# Altium PCB CR-10 Motherboard.PcbDoc (part 8 of 14)
Units mil, origin at the board's own origin, x right, y up, seen from the top; angles counter-clockwise.
Board outline 3970.48 x 2769.68 mil, 2 copper layers (TopLayer, BottomLayer); 147 components, 128 nets, 667 pads, 614 vias.
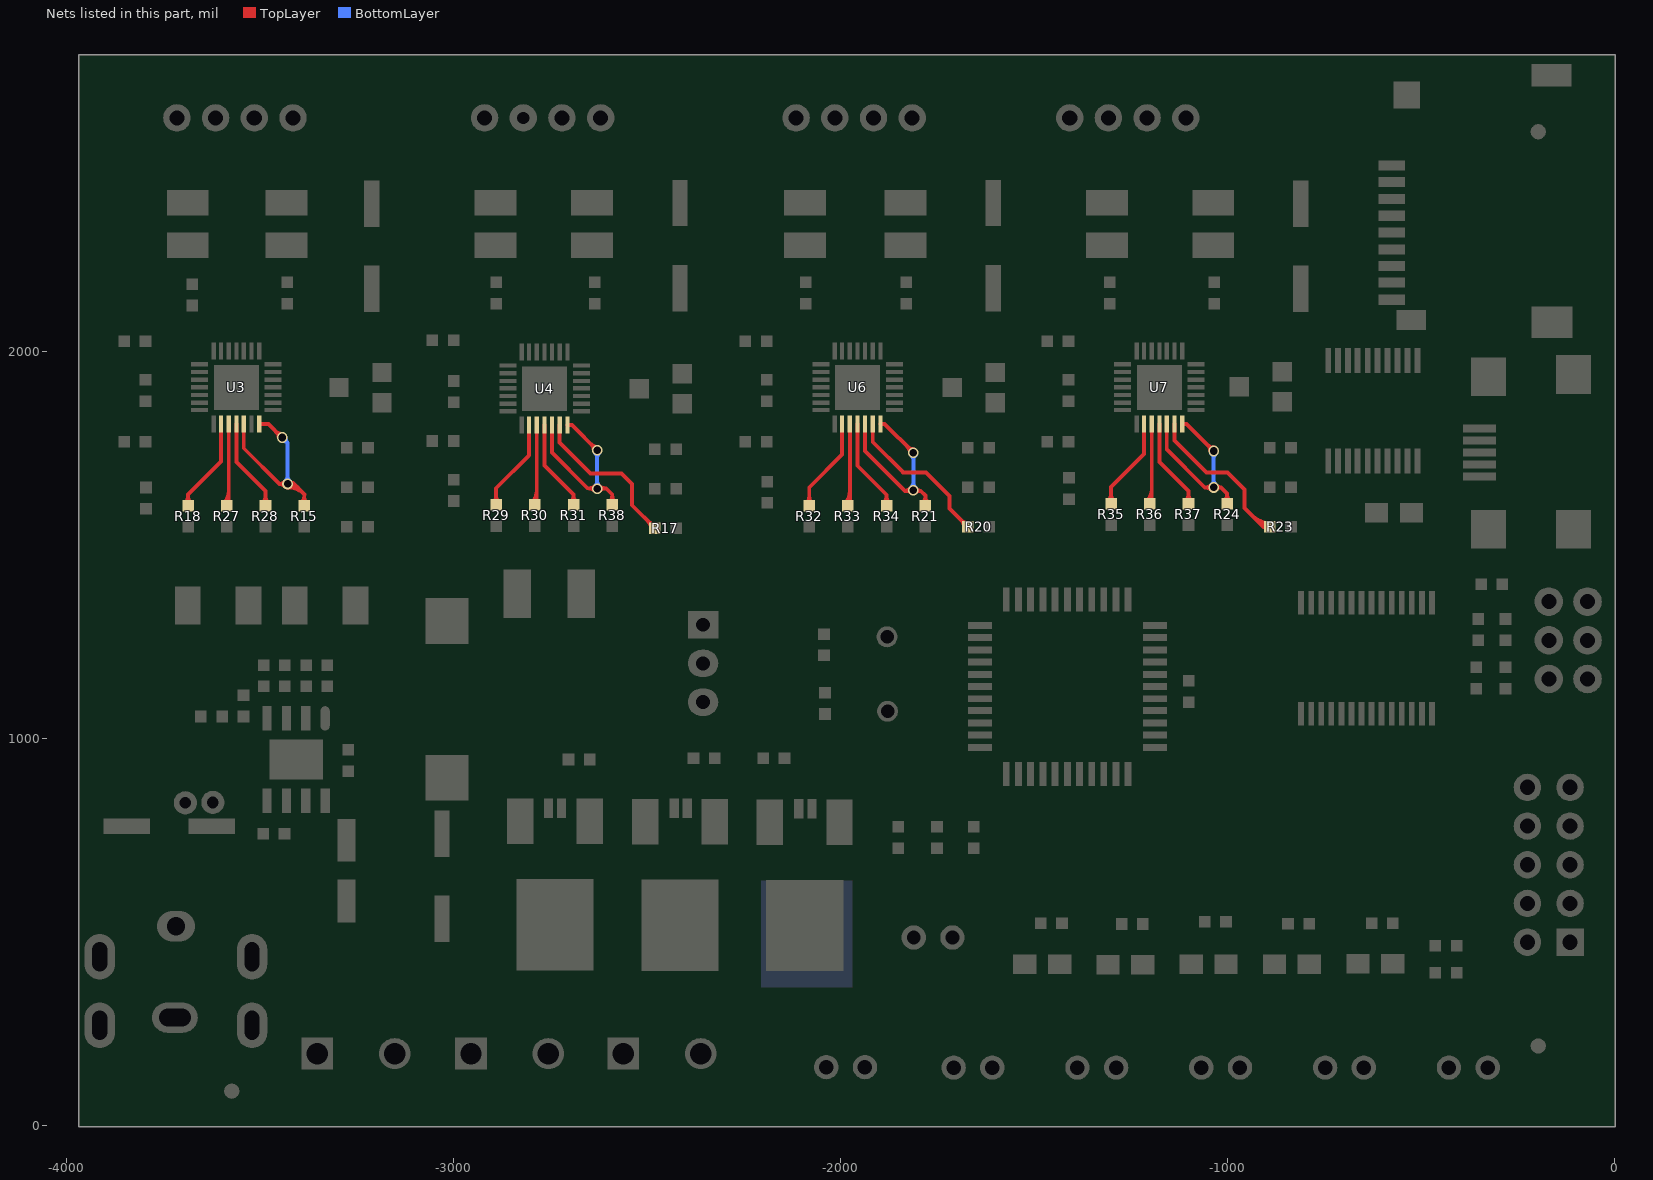
[diagram p8: the nets of this part, all layers, seen from the top]

## Via types
v1: diameter 28, hole 18, TopLayer to BottomLayer, tented both sides, 246 vias
v2: diameter 27.56, hole 19.68, TopLayer to BottomLayer, tented both sides, 196 vias
v3: diameter 20, hole 12, TopLayer to BottomLayer, tented both sides, 124 vias
v4: diameter 27.56, hole 11.81, TopLayer to BottomLayer, tented bottom, 16 vias
v5: diameter 27.56, hole 19.68, TopLayer to BottomLayer, 16 vias
v6: diameter 20, hole 12, TopLayer to BottomLayer, 12 vias
v7: diameter 28, hole 11.81, TopLayer to BottomLayer, tented both sides, 4 vias

## Nets (pads, with @x,y where several pads share a name; then routed paths per layer and width w, separated by ;. In a path a pad name is that pad's centre, name@x,y a point inside that pad or via, vN(x,y) a via of type N, cw(c..) or ccw(c..) an arc to the next point about the centre after c; other vN are vias at no path point) (continued)
NetR15_1: R15.1 U3.12 U3.14 | length 2802.5
  TopLayer w10: -3541.62,1750.93 U3.12@-3541.62,1813.88 ; -3540.62,1749.93 -3449.59,1658.9 ; U3.14@-3501.62,1813.88 -3501.12,1813.38 -3478.07,1813.38 v2@-3442.54,1777.84 ; v2@-3429.27,1659.87 cw(c-3421.02,1648.85) -3411.28,1658.59 ; v2@-3428.54,1650.12 cw(c-3428.54,1588.01) -3384.62,1631.93 ; v2@-3428.54,1660.12 cw(c-3428.54,1622.15) -3401.69,1649 ; v2@-3423.28,1651.87 cw(c-3414.03,1639.51) -3403.12,1650.42 ; R15.1@-3385.62,1602.88 -3385.62,1632.93 -3411.59,1658.9 ; -3459.23,1794.54 ccw(c-3442.54,1811.23) v2@-3442.54,1787.62 ; -3459.23,1794.54 ccw(c-3442.54,1811.23) v2@-3442.54,1787.62 ; -3459.23,1794.54 ccw(c-3442.54,1811.23) v2@-3442.54,1787.62 ; -3459.23,1794.54 ccw(c-3442.54,1811.23) v2@-3442.54,1787.62 ; -3459.23,1794.54 ccw(c-3442.54,1811.23) v2@-3442.54,1787.62 ; -3459.23,1794.54 ccw(c-3442.54,1811.23) v2@-3442.54,1787.62 ; -3459.23,1794.54 ccw(c-3442.54,1811.23) v2@-3442.54,1787.62 ; -3459.23,1794.54 ccw(c-3442.54,1811.23) v2@-3442.54,1787.62 ; -3459.23,1794.54 ccw(c-3442.54,1811.23) v2@-3442.54,1787.62 ; -3456.82,1792.12 cw(c-3470.1,1778.84) v2@-3451.31,1778.84 ; -3456.82,1792.12 cw(c-3470.1,1778.84) v2@-3451.31,1778.84 ; -3456.82,1792.12 cw(c-3470.1,1778.84) v2@-3451.31,1778.84 ; -3456.82,1792.12 cw(c-3470.1,1778.84) v2@-3451.31,1778.84 ; -3456.82,1792.12 cw(c-3470.1,1778.84) v2@-3451.31,1778.84 ; -3456.82,1792.12 cw(c-3470.1,1778.84) v2@-3451.31,1778.84 ; -3456.82,1792.12 cw(c-3470.1,1778.84) v2@-3451.31,1778.84 ; -3456.82,1792.12 cw(c-3470.1,1778.84) v2@-3451.31,1778.84 ; -3456.82,1792.12 cw(c-3470.1,1778.84) v2@-3451.31,1778.84 ; -3449.59,1658.9 cw(c-3449.59,1638.04) v2@-3434.77,1652.72 ; -3449.59,1658.9 ccw(c-3449.59,1679.75) v2@-3434.77,1665.07 ; -3449.59,1658.9 cw(c-3449.59,1638.04) v2@-3434.77,1652.72 ; -3449.59,1658.9 ccw(c-3449.59,1679.75) v2@-3434.77,1665.07 ; -3449.59,1658.9 cw(c-3449.59,1638.04) v2@-3434.77,1652.72 ; -3449.59,1658.9 ccw(c-3449.59,1679.75) v2@-3434.77,1665.07 ; -3449.59,1658.9 cw(c-3449.59,1638.04) v2@-3434.77,1652.72 ; -3449.59,1658.9 ccw(c-3449.59,1679.75) v2@-3434.77,1665.07 ; -3449.59,1658.9 cw(c-3449.59,1638.04) v2@-3434.77,1652.72 ; -3449.59,1658.9 ccw(c-3449.59,1679.75) v2@-3434.77,1665.07 ; -3449.59,1658.9 ccw(c-3449.59,1679.75) v2@-3434.77,1665.07 ; -3449.59,1658.9 cw(c-3449.59,1638.04) v2@-3434.77,1652.72 ; -3449.59,1658.9 ccw(c-3449.59,1679.75) v2@-3434.77,1665.07 ; -3449.59,1658.9 cw(c-3449.59,1638.04) v2@-3434.77,1652.72 ; -3449.59,1658.9 ccw(c-3449.59,1679.75) v2@-3434.77,1665.07 ; -3449.59,1658.9 cw(c-3449.59,1638.04) v2@-3434.77,1652.72 ; -3449.59,1658.9 ccw(c-3449.59,1679.75) v2@-3434.77,1665.07 ; -3449.59,1658.9 cw(c-3449.59,1638.04) v2@-3434.77,1652.72 ; -3449.59,1658.9 -3411.59,1658.9 ; v2@-3428.83,1660.08 cw(c-3423.17,1637.34) -3406.6,1653.91 ; v2@-3428.83,1660.08 cw(c-3423.17,1637.34) -3406.6,1653.91 ; v2@-3428.83,1660.08 cw(c-3423.17,1637.34) -3406.6,1653.91 ; v2@-3428.83,1660.08 cw(c-3423.17,1637.34) -3406.6,1653.91 ; v2@-3428.83,1660.08 cw(c-3423.17,1637.34) -3406.6,1653.91 ; v2@-3428.83,1660.08 cw(c-3423.17,1637.34) -3406.6,1653.91 ; v2@-3428.83,1660.08 cw(c-3423.17,1637.34) -3406.6,1653.91 ; v2@-3428.83,1660.08 cw(c-3423.17,1637.34) -3406.6,1653.91 ; v2@-3426.42,1650.38 cw(c-3418.19,1617.31) -3394.1,1641.4 ; v2@-3426.42,1650.38 cw(c-3418.19,1617.31) -3394.1,1641.4 ; v2@-3426.42,1650.38 cw(c-3418.19,1617.31) -3394.1,1641.4 ; v2@-3426.42,1650.38 cw(c-3418.19,1617.31) -3394.1,1641.4 ; v2@-3426.42,1650.38 cw(c-3418.19,1617.31) -3394.1,1641.4 ; v2@-3426.42,1650.38 cw(c-3418.19,1617.31) -3394.1,1641.4 ; v2@-3426.42,1650.38 cw(c-3418.19,1617.31) -3394.1,1641.4 ; v2@-3426.42,1650.38 cw(c-3418.19,1617.31) -3394.1,1641.4 ; v2@-3421.36,1653.83 cw(c-3411.59,1646.93) -3411.59,1658.9 ; v2@-3421.36,1653.83 cw(c-3411.59,1646.93) -3411.59,1658.9 ; v2@-3421.36,1653.83 cw(c-3411.59,1646.93) -3411.59,1658.9 ; v2@-3421.36,1653.83 cw(c-3411.59,1646.93) -3411.59,1658.9 ; v2@-3421.36,1653.83 cw(c-3411.59,1646.93) -3411.59,1658.9 ; v2@-3421.36,1653.83 cw(c-3411.59,1646.93) -3411.59,1658.9 ; v2@-3421.36,1653.83 cw(c-3411.59,1646.93) -3411.59,1658.9 ; v2@-3421.36,1653.83 cw(c-3411.59,1646.93) -3411.59,1658.9 ; v2@-3421.36,1653.83 cw(c-3411.59,1646.93) -3411.59,1658.9 ; v2@-3421.36,1663.96 ccw(c-3411.59,1670.86) -3411.59,1658.9 ; v2@-3421.36,1663.96 ccw(c-3411.59,1670.86) -3411.59,1658.9 ; v2@-3421.36,1663.96 ccw(c-3411.59,1670.86) -3411.59,1658.9 ; v2@-3421.36,1663.96 ccw(c-3411.59,1670.86) -3411.59,1658.9 ; v2@-3421.36,1663.96 ccw(c-3411.59,1670.86) -3411.59,1658.9 ; v2@-3421.36,1663.96 ccw(c-3411.59,1670.86) -3411.59,1658.9 ; v2@-3421.36,1663.96 ccw(c-3411.59,1670.86) -3411.59,1658.9 ; v2@-3421.36,1663.96 ccw(c-3411.59,1670.86) -3411.59,1658.9 ; v2@-3421.36,1663.96 ccw(c-3411.59,1670.86) -3411.59,1658.9 ; R15.1@-3392.69,1609.95 ccw(c-3409.76,1627.02) -3385.62,1627.02 ; R15.1@-3392.69,1609.95 ccw(c-3409.76,1627.02) -3385.62,1627.02 ; R15.1@-3392.69,1609.95 ccw(c-3409.76,1627.02) -3385.62,1627.02 ; R15.1@-3392.69,1609.95 ccw(c-3409.76,1627.02) -3385.62,1627.02 ; R15.1@-3392.69,1609.95 ccw(c-3409.76,1627.02) -3385.62,1627.02 ; R15.1@-3392.69,1609.95 ccw(c-3409.76,1627.02) -3385.62,1627.02 ; R15.1@-3392.69,1609.95 ccw(c-3409.76,1627.02) -3385.62,1627.02 ; R15.1@-3392.69,1609.95 ccw(c-3409.76,1627.02) -3385.62,1627.02 ; R15.1@-3392.69,1609.95 ccw(c-3409.76,1627.02) -3385.62,1627.02 ; -3385.62,1627.02 ccw(c-3361.48,1627.02) R15.1@-3378.55,1609.95 ; -3385.62,1627.02 ccw(c-3361.48,1627.02) R15.1@-3378.55,1609.95 ; -3385.62,1627.02 ccw(c-3361.48,1627.02) R15.1@-3378.55,1609.95 ; -3385.62,1627.02 ccw(c-3361.48,1627.02) R15.1@-3378.55,1609.95 ; -3385.62,1627.02 ccw(c-3361.48,1627.02) R15.1@-3378.55,1609.95 ; -3385.62,1627.02 ccw(c-3361.48,1627.02) R15.1@-3378.55,1609.95 ; -3385.62,1627.02 ccw(c-3361.48,1627.02) R15.1@-3378.55,1609.95 ; -3385.62,1627.02 ccw(c-3361.48,1627.02) R15.1@-3378.55,1609.95 ; -3385.62,1627.02 ccw(c-3361.48,1627.02) R15.1@-3378.55,1609.95
  BottomLayer w10: v2(-3442.54,1778.84) -3428.54,1764.84 ; v2(-3428.54,1658.9) -3428.54,1764.84 ; v2@-3442.1,1770.07 cw(c-3441.22,1752.16) -3428.54,1764.84 ; v2@-3442.1,1770.07 cw(c-3441.22,1752.16) -3428.54,1764.84 ; v2@-3442.1,1770.07 cw(c-3441.22,1752.16) -3428.54,1764.84 ; v2@-3442.1,1770.07 cw(c-3441.22,1752.16) -3428.54,1764.84 ; v2@-3442.1,1770.07 cw(c-3441.22,1752.16) -3428.54,1764.84 ; v2@-3442.1,1770.07 cw(c-3441.22,1752.16) -3428.54,1764.84 ; v2@-3442.1,1770.07 cw(c-3441.22,1752.16) -3428.54,1764.84 ; v2@-3442.1,1770.07 cw(c-3441.22,1752.16) -3428.54,1764.84 ; v2@-3442.1,1770.07 cw(c-3441.22,1752.16) -3428.54,1764.84 ; v2@-3434.74,1665.1 ccw(c-3449.73,1680.09) -3428.54,1680.09 ; v2@-3434.74,1665.1 ccw(c-3449.73,1680.09) -3428.54,1680.09 ; v2@-3434.74,1665.1 ccw(c-3449.73,1680.09) -3428.54,1680.09 ; v2@-3434.74,1665.1 ccw(c-3449.73,1680.09) -3428.54,1680.09 ; v2@-3434.74,1665.1 ccw(c-3449.73,1680.09) -3428.54,1680.09 ; v2@-3434.74,1665.1 ccw(c-3449.73,1680.09) -3428.54,1680.09 ; v2@-3434.74,1665.1 ccw(c-3449.73,1680.09) -3428.54,1680.09 ; v2@-3434.74,1665.1 ccw(c-3449.73,1680.09) -3428.54,1680.09 ; v2@-3434.74,1665.1 ccw(c-3449.73,1680.09) -3428.54,1680.09 ; v2@-3433.77,1778.41 ccw(c-3415.86,1777.52) -3428.54,1764.84 ; v2@-3433.77,1778.41 ccw(c-3415.86,1777.52) -3428.54,1764.84 ; v2@-3433.77,1778.41 ccw(c-3415.86,1777.52) -3428.54,1764.84 ; v2@-3433.77,1778.41 ccw(c-3415.86,1777.52) -3428.54,1764.84 ; v2@-3433.77,1778.41 ccw(c-3415.86,1777.52) -3428.54,1764.84 ; v2@-3433.77,1778.41 ccw(c-3415.86,1777.52) -3428.54,1764.84 ; v2@-3433.77,1778.41 ccw(c-3415.86,1777.52) -3428.54,1764.84 ; v2@-3433.77,1778.41 ccw(c-3415.86,1777.52) -3428.54,1764.84 ; v2@-3433.77,1778.41 ccw(c-3415.86,1777.52) -3428.54,1764.84 ; -3428.54,1680.09 ccw(c-3407.34,1680.09) v2@-3422.33,1665.1 ; -3428.54,1680.09 ccw(c-3407.34,1680.09) v2@-3422.33,1665.1 ; -3428.54,1680.09 ccw(c-3407.34,1680.09) v2@-3422.33,1665.1 ; -3428.54,1680.09 ccw(c-3407.34,1680.09) v2@-3422.33,1665.1 ; -3428.54,1680.09 ccw(c-3407.34,1680.09) v2@-3422.33,1665.1 ; -3428.54,1680.09 ccw(c-3407.34,1680.09) v2@-3422.33,1665.1 ; -3428.54,1680.09 ccw(c-3407.34,1680.09) v2@-3422.33,1665.1 ; -3428.54,1680.09 ccw(c-3407.34,1680.09) v2@-3422.33,1665.1 ; -3428.54,1680.09 ccw(c-3407.34,1680.09) v2@-3422.33,1665.1
NetR17_1: R17.1 U4.13 | length 756.1
  TopLayer w10: U4.13@-2725.54,1810.84 -2725.54,1765.84 -2645.54,1685.84 -2565.54,1685.84 -2538.54,1658.84 -2538.54,1603.84 R17.1@-2479.54,1544.84 ; -2496.61,1561.91 cw(c-2513.68,1544.84) R17.1@-2489.54,1544.84 ; -2496.61,1561.91 ccw(c-2479.54,1578.98) R17.1@-2479.54,1554.84 ; -2496.61,1561.91 cw(c-2513.68,1544.84) R17.1@-2489.54,1544.84 ; -2496.61,1561.91 ccw(c-2479.54,1578.98) R17.1@-2479.54,1554.84 ; -2496.61,1561.91 cw(c-2513.68,1544.84) R17.1@-2489.54,1544.84 ; -2496.61,1561.91 ccw(c-2479.54,1578.98) R17.1@-2479.54,1554.84 ; -2496.61,1561.91 cw(c-2513.68,1544.84) R17.1@-2489.54,1544.84 ; -2496.61,1561.91 ccw(c-2479.54,1578.98) R17.1@-2479.54,1554.84 ; -2496.61,1561.91 cw(c-2513.68,1544.84) R17.1@-2489.54,1544.84 ; -2496.61,1561.91 ccw(c-2479.54,1578.98) R17.1@-2479.54,1554.84 ; -2496.61,1561.91 ccw(c-2479.54,1578.98) R17.1@-2479.54,1554.84 ; -2496.61,1561.91 cw(c-2513.68,1544.84) R17.1@-2489.54,1544.84 ; -2496.61,1561.91 ccw(c-2479.54,1578.98) R17.1@-2479.54,1554.84 ; -2496.61,1561.91 cw(c-2513.68,1544.84) R17.1@-2489.54,1544.84 ; -2496.61,1561.91 ccw(c-2479.54,1578.98) R17.1@-2479.54,1554.84 ; -2496.61,1561.91 cw(c-2513.68,1544.84) R17.1@-2489.54,1544.84 ; -2496.61,1561.91 ccw(c-2479.54,1578.98) R17.1@-2479.54,1554.84 ; -2496.61,1561.91 cw(c-2513.68,1544.84) R17.1@-2489.54,1544.84
NetR18_1: R18.1 U3.9 | length 576
  TopLayer w10: R18.1@-3685.62,1602.88 -3685.62,1631.76 -3600.62,1716.76 -3600.62,1776.88 ; U3.9@-3600.62,1795.97 -3600.62,1776.97 -3600.54,1776.88 ; U3.9@-3600.62,1813.88 -3600.62,1807.64 U3.9@-3600.54,1807.55 ; R18.1@-3692.69,1609.95 ccw(c-3709.76,1627.02) -3685.62,1627.02 ; R18.1@-3692.69,1609.95 ccw(c-3709.76,1627.02) -3685.62,1627.02 ; R18.1@-3692.69,1609.95 ccw(c-3709.76,1627.02) -3685.62,1627.02 ; R18.1@-3692.69,1609.95 ccw(c-3709.76,1627.02) -3685.62,1627.02 ; R18.1@-3692.69,1609.95 ccw(c-3709.76,1627.02) -3685.62,1627.02 ; R18.1@-3692.69,1609.95 ccw(c-3709.76,1627.02) -3685.62,1627.02 ; R18.1@-3692.69,1609.95 ccw(c-3709.76,1627.02) -3685.62,1627.02 ; R18.1@-3692.69,1609.95 ccw(c-3709.76,1627.02) -3685.62,1627.02 ; R18.1@-3692.69,1609.95 ccw(c-3709.76,1627.02) -3685.62,1627.02 ; -3685.62,1627.02 ccw(c-3661.48,1627.02) R18.1@-3678.55,1609.95 ; -3685.62,1627.02 ccw(c-3661.48,1627.02) R18.1@-3678.55,1609.95 ; -3685.62,1627.02 ccw(c-3661.48,1627.02) R18.1@-3678.55,1609.95 ; -3685.62,1627.02 ccw(c-3661.48,1627.02) R18.1@-3678.55,1609.95 ; -3685.62,1627.02 ccw(c-3661.48,1627.02) R18.1@-3678.55,1609.95 ; -3685.62,1627.02 ccw(c-3661.48,1627.02) R18.1@-3678.55,1609.95 ; -3685.62,1627.02 ccw(c-3661.48,1627.02) R18.1@-3678.55,1609.95 ; -3685.62,1627.02 ccw(c-3661.48,1627.02) R18.1@-3678.55,1609.95 ; -3685.62,1627.02 ccw(c-3661.48,1627.02) R18.1@-3678.55,1609.95
NetR20_1: R20.1 U6.13 | length 743.8
  TopLayer w10: U6.13@-1916.62,1813.88 -1916.62,1767.93 -1838.15,1689.45 -1838.15,1688.45 -1779.15,1688.45 -1718.54,1627.84 -1718.54,1595.79 R20.1@-1670.62,1547.88 ; -1687.69,1564.95 cw(c-1704.76,1547.88) R20.1@-1680.62,1547.88 ; -1687.69,1564.95 ccw(c-1670.62,1582.02) R20.1@-1670.62,1557.88 ; -1687.69,1564.95 cw(c-1704.76,1547.88) R20.1@-1680.62,1547.88 ; -1687.69,1564.95 ccw(c-1670.62,1582.02) R20.1@-1670.62,1557.88 ; -1687.69,1564.95 cw(c-1704.76,1547.88) R20.1@-1680.62,1547.88 ; -1687.69,1564.95 ccw(c-1670.62,1582.02) R20.1@-1670.62,1557.88 ; -1687.69,1564.95 cw(c-1704.76,1547.88) R20.1@-1680.62,1547.88 ; -1687.69,1564.95 ccw(c-1670.62,1582.02) R20.1@-1670.62,1557.88 ; -1687.69,1564.95 cw(c-1704.76,1547.88) R20.1@-1680.62,1547.88 ; -1687.69,1564.95 ccw(c-1670.62,1582.02) R20.1@-1670.62,1557.88 ; -1687.69,1564.95 ccw(c-1670.62,1582.02) R20.1@-1670.62,1557.88 ; -1687.69,1564.95 cw(c-1704.76,1547.88) R20.1@-1680.62,1547.88 ; -1687.69,1564.95 ccw(c-1670.62,1582.02) R20.1@-1670.62,1557.88 ; -1687.69,1564.95 cw(c-1704.76,1547.88) R20.1@-1680.62,1547.88 ; -1687.69,1564.95 ccw(c-1670.62,1582.02) R20.1@-1670.62,1557.88 ; -1687.69,1564.95 cw(c-1704.76,1547.88) R20.1@-1680.62,1547.88 ; -1687.69,1564.95 ccw(c-1670.62,1582.02) R20.1@-1670.62,1557.88 ; -1687.69,1564.95 cw(c-1704.76,1547.88) R20.1@-1680.62,1547.88
NetR21_1: R21.1 U6.12 U6.14 | length 2237.5
  TopLayer w10: U6.12@-1936.62,1813.88 -1936.62,1743.93 -1833.54,1640.84 ; U6.14@-1896.12,1813.88 U6.14@-1896.62,1813.88 -1885.67,1813.88 v2(-1811.54,1739.75) ; v2@-1804,1647.35 ccw(c-1792.54,1654.2) -1792.54,1640.84 ; R21.1@-1780.62,1602.88 -1780.62,1628.93 -1792.54,1640.84 ; -1833.53,1640.84 ccw(c-1833.53,1659.9) v2@-1818.47,1648.22 ; -1833.53,1640.84 ccw(c-1833.53,1659.9) v2@-1818.47,1648.22 ; -1833.53,1640.84 ccw(c-1833.53,1659.9) v2@-1818.47,1648.22 ; -1833.53,1640.84 ccw(c-1833.53,1659.9) v2@-1818.47,1648.22 ; -1833.53,1640.84 ccw(c-1833.53,1659.9) v2@-1818.47,1648.22 ; -1833.53,1640.84 ccw(c-1833.53,1659.9) v2@-1818.47,1648.22 ; -1833.53,1640.84 ccw(c-1833.53,1659.9) v2@-1818.47,1648.22 ; -1833.53,1640.84 ccw(c-1833.53,1659.9) v2@-1818.47,1648.22 ; -1833.53,1640.84 ccw(c-1833.53,1659.9) v2@-1818.47,1648.22 ; -1833.54,1640.84 -1792.54,1640.84 ; -1827.9,1640.84 cw(c-1827.9,1626.48) v2@-1817.74,1636.63 ; -1827.9,1640.84 cw(c-1827.9,1626.48) v2@-1817.74,1636.63 ; -1827.9,1640.84 cw(c-1827.9,1626.48) v2@-1817.74,1636.63 ; -1827.9,1640.84 cw(c-1827.9,1626.48) v2@-1817.74,1636.63 ; -1827.9,1640.84 cw(c-1827.9,1626.48) v2@-1817.74,1636.63 ; -1827.9,1640.84 cw(c-1827.9,1626.48) v2@-1817.74,1636.63 ; -1827.9,1640.84 cw(c-1827.9,1626.48) v2@-1817.74,1636.63 ; -1827.9,1640.84 cw(c-1827.9,1626.48) v2@-1817.74,1636.63 ; -1827.9,1640.84 cw(c-1827.9,1626.48) v2@-1817.74,1636.63 ; -1826.52,1754.73 cw(c-1841.51,1739.75) v2@-1820.31,1739.75 ; -1826.52,1754.73 ccw(c-1811.54,1769.72) v2@-1811.54,1748.52 ; -1826.52,1754.73 cw(c-1841.51,1739.75) v2@-1820.31,1739.75 ; -1826.52,1754.73 ccw(c-1811.54,1769.72) v2@-1811.54,1748.52 ; -1826.52,1754.73 cw(c-1841.51,1739.75) v2@-1820.31,1739.75 ; -1826.52,1754.73 ccw(c-1811.54,1769.72) v2@-1811.54,1748.52 ; -1826.52,1754.73 cw(c-1841.51,1739.75) v2@-1820.31,1739.75 ; -1826.52,1754.73 ccw(c-1811.54,1769.72) v2@-1811.54,1748.52 ; -1826.52,1754.73 cw(c-1841.51,1739.75) v2@-1820.31,1739.75 ; -1826.52,1754.73 ccw(c-1811.54,1769.72) v2@-1811.54,1748.52 ; -1826.52,1754.73 ccw(c-1811.54,1769.72) v2@-1811.54,1748.52 ; -1826.52,1754.73 cw(c-1841.51,1739.75) v2@-1820.31,1739.75 ; -1826.52,1754.73 ccw(c-1811.54,1769.72) v2@-1811.54,1748.52 ; -1826.52,1754.73 cw(c-1841.51,1739.75) v2@-1820.31,1739.75 ; -1826.52,1754.73 ccw(c-1811.54,1769.72) v2@-1811.54,1748.52 ; -1826.52,1754.73 cw(c-1841.51,1739.75) v2@-1820.31,1739.75 ; -1826.52,1754.73 ccw(c-1811.54,1769.72) v2@-1811.54,1748.52 ; -1826.52,1754.73 cw(c-1841.51,1739.75) v2@-1820.31,1739.75 ; v2@-1805.33,1636.63 cw(c-1795.17,1626.48) -1795.17,1640.84 ; v2@-1805.33,1636.63 cw(c-1795.17,1626.48) -1795.17,1640.84 ; v2@-1805.33,1636.63 cw(c-1795.17,1626.48) -1795.17,1640.84 ; v2@-1805.33,1636.63 cw(c-1795.17,1626.48) -1795.17,1640.84 ; v2@-1805.33,1636.63 cw(c-1795.17,1626.48) -1795.17,1640.84 ; v2@-1805.33,1636.63 cw(c-1795.17,1626.48) -1795.17,1640.84 ; v2@-1805.33,1636.63 cw(c-1795.17,1626.48) -1795.17,1640.84 ; v2@-1805.33,1636.63 cw(c-1795.17,1626.48) -1795.17,1640.84 ; v2@-1805.33,1636.63 cw(c-1795.17,1626.48) -1795.17,1640.84 ; v2@-1804.02,1647.38 ccw(c-1792.43,1654.38) -1792.43,1640.84 ; v2@-1804.02,1647.38 ccw(c-1792.43,1654.38) -1792.43,1640.84 ; v2@-1804.02,1647.38 ccw(c-1792.43,1654.38) -1792.43,1640.84 ; v2@-1804.02,1647.38 ccw(c-1792.43,1654.38) -1792.43,1640.84 ; v2@-1804.02,1647.38 ccw(c-1792.43,1654.38) -1792.43,1640.84 ; v2@-1804.02,1647.38 ccw(c-1792.43,1654.38) -1792.43,1640.84 ; v2@-1804.02,1647.38 ccw(c-1792.43,1654.38) -1792.43,1640.84 ; v2@-1804.02,1647.38 ccw(c-1792.43,1654.38) -1792.43,1640.84 ; R21.1@-1787.69,1609.95 ccw(c-1804.76,1627.02) -1780.62,1627.02 ; R21.1@-1787.69,1609.95 ccw(c-1804.76,1627.02) -1780.62,1627.02 ; R21.1@-1787.69,1609.95 ccw(c-1804.76,1627.02) -1780.62,1627.02 ; R21.1@-1787.69,1609.95 ccw(c-1804.76,1627.02) -1780.62,1627.02 ; R21.1@-1787.69,1609.95 ccw(c-1804.76,1627.02) -1780.62,1627.02 ; R21.1@-1787.69,1609.95 ccw(c-1804.76,1627.02) -1780.62,1627.02 ; R21.1@-1787.69,1609.95 ccw(c-1804.76,1627.02) -1780.62,1627.02 ; R21.1@-1787.69,1609.95 ccw(c-1804.76,1627.02) -1780.62,1627.02 ; R21.1@-1787.69,1609.95 ccw(c-1804.76,1627.02) -1780.62,1627.02 ; -1780.62,1627.02 ccw(c-1756.48,1627.02) R21.1@-1773.55,1609.95 ; -1780.62,1627.02 ccw(c-1756.48,1627.02) R21.1@-1773.55,1609.95 ; -1780.62,1627.02 ccw(c-1756.48,1627.02) R21.1@-1773.55,1609.95 ; -1780.62,1627.02 ccw(c-1756.48,1627.02) R21.1@-1773.55,1609.95 ; -1780.62,1627.02 ccw(c-1756.48,1627.02) R21.1@-1773.55,1609.95 ; -1780.62,1627.02 ccw(c-1756.48,1627.02) R21.1@-1773.55,1609.95 ; -1780.62,1627.02 ccw(c-1756.48,1627.02) R21.1@-1773.55,1609.95 ; -1780.62,1627.02 ccw(c-1756.48,1627.02) R21.1@-1773.55,1609.95 ; -1780.62,1627.02 ccw(c-1756.48,1627.02) R21.1@-1773.55,1609.95
  BottomLayer w10: v2(-1811.54,1642.84) v2(-1811.54,1739.75) ; v2@-1817.74,1649.05 ccw(c-1832.73,1664.04) -1811.54,1664.04 ; v2@-1817.74,1649.05 ccw(c-1832.73,1664.04) -1811.54,1664.04 ; v2@-1817.74,1649.05 ccw(c-1832.73,1664.04) -1811.54,1664.04 ; v2@-1817.74,1649.05 ccw(c-1832.73,1664.04) -1811.54,1664.04 ; v2@-1817.74,1649.05 ccw(c-1832.73,1664.04) -1811.54,1664.04 ; v2@-1817.74,1649.05 ccw(c-1832.73,1664.04) -1811.54,1664.04 ; v2@-1817.74,1649.05 ccw(c-1832.73,1664.04) -1811.54,1664.04 ; v2@-1817.74,1649.05 ccw(c-1832.73,1664.04) -1811.54,1664.04 ; v2@-1817.74,1649.05 ccw(c-1832.73,1664.04) -1811.54,1664.04 ; v2@-1817.74,1733.54 cw(c-1832.73,1718.55) -1811.54,1718.55 ; v2@-1817.74,1733.54 cw(c-1832.73,1718.55) -1811.54,1718.55 ; v2@-1817.74,1733.54 cw(c-1832.73,1718.55) -1811.54,1718.55 ; v2@-1817.74,1733.54 cw(c-1832.73,1718.55) -1811.54,1718.55 ; v2@-1817.74,1733.54 cw(c-1832.73,1718.55) -1811.54,1718.55 ; v2@-1817.74,1733.54 cw(c-1832.73,1718.55) -1811.54,1718.55 ; v2@-1817.74,1733.54 cw(c-1832.73,1718.55) -1811.54,1718.55 ; v2@-1817.74,1733.54 cw(c-1832.73,1718.55) -1811.54,1718.55 ; v2@-1817.74,1733.54 cw(c-1832.73,1718.55) -1811.54,1718.55 ; -1811.54,1664.04 ccw(c-1790.34,1664.04) v2@-1805.33,1649.05 ; -1811.54,1664.04 ccw(c-1790.34,1664.04) v2@-1805.33,1649.05 ; -1811.54,1664.04 ccw(c-1790.34,1664.04) v2@-1805.33,1649.05 ; -1811.54,1664.04 ccw(c-1790.34,1664.04) v2@-1805.33,1649.05 ; -1811.54,1664.04 ccw(c-1790.34,1664.04) v2@-1805.33,1649.05 ; -1811.54,1664.04 ccw(c-1790.34,1664.04) v2@-1805.33,1649.05 ; -1811.54,1664.04 ccw(c-1790.34,1664.04) v2@-1805.33,1649.05 ; -1811.54,1664.04 ccw(c-1790.34,1664.04) v2@-1805.33,1649.05 ; -1811.54,1664.04 ccw(c-1790.34,1664.04) v2@-1805.33,1649.05 ; -1811.54,1718.55 cw(c-1790.34,1718.55) v2@-1805.33,1733.54 ; -1811.54,1718.55 cw(c-1790.34,1718.55) v2@-1805.33,1733.54 ; -1811.54,1718.55 cw(c-1790.34,1718.55) v2@-1805.33,1733.54 ; -1811.54,1718.55 cw(c-1790.34,1718.55) v2@-1805.33,1733.54 ; -1811.54,1718.55 cw(c-1790.34,1718.55) v2@-1805.33,1733.54 ; -1811.54,1718.55 cw(c-1790.34,1718.55) v2@-1805.33,1733.54 ; -1811.54,1718.55 cw(c-1790.34,1718.55) v2@-1805.33,1733.54 ; -1811.54,1718.55 cw(c-1790.34,1718.55) v2@-1805.33,1733.54 ; -1811.54,1718.55 cw(c-1790.34,1718.55) v2@-1805.33,1733.54
NetR23_1: R23.1 U7.13 | length 1280.2
  TopLayer w10: U7.13@-1136.62,1813.88 -1136.62,1770.93 -1054.54,1688.84 -999.54,1688.84 -955.54,1644.84 -955.54,1596.84 -906.57,1547.88 ; -934.92,1576.23 ccw(c-890.62,1620.53) R23.1@-890.62,1557.88 ; -934.92,1576.23 ccw(c-890.62,1620.53) R23.1@-890.62,1557.88 ; -934.92,1576.23 ccw(c-890.62,1620.53) R23.1@-890.62,1557.88 ; -934.92,1576.23 ccw(c-890.62,1620.53) R23.1@-890.62,1557.88 ; -934.92,1576.23 ccw(c-890.62,1620.53) R23.1@-890.62,1557.88 ; -934.92,1576.23 ccw(c-890.62,1620.53) R23.1@-890.62,1557.88 ; -934.92,1576.23 ccw(c-890.62,1620.53) R23.1@-890.62,1557.88 ; -934.92,1576.23 ccw(c-890.62,1620.53) R23.1@-890.62,1557.88 ; -934.92,1576.23 ccw(c-890.62,1620.53) R23.1@-890.62,1557.88 ; -917.85,1559.16 ccw(c-890.62,1586.39) R23.1@-890.62,1547.88 ; -917.85,1559.16 ccw(c-890.62,1586.39) R23.1@-890.62,1547.88 ; -917.85,1559.16 ccw(c-890.62,1586.39) R23.1@-890.62,1547.88 ; -917.85,1559.16 ccw(c-890.62,1586.39) R23.1@-890.62,1547.88 ; -917.85,1559.16 ccw(c-890.62,1586.39) R23.1@-890.62,1547.88 ; -917.85,1559.16 ccw(c-890.62,1586.39) R23.1@-890.62,1547.88 ; -917.85,1559.16 ccw(c-890.62,1586.39) R23.1@-890.62,1547.88 ; -917.85,1559.16 ccw(c-890.62,1586.39) R23.1@-890.62,1547.88 ; -917.85,1559.16 ccw(c-890.62,1586.39) R23.1@-890.62,1547.88 ; -906.57,1547.88 cw(c-906.57,1540.16) R23.1@-899.62,1543.52 ; -906.57,1547.88 ccw(c-906.57,1555.6) R23.1@-899.62,1552.24 ; -906.57,1547.88 cw(c-906.57,1540.16) R23.1@-899.62,1543.52 ; -906.57,1547.88 ccw(c-906.57,1555.6) R23.1@-899.62,1552.24 ; -906.57,1547.88 cw(c-906.57,1540.16) R23.1@-899.62,1543.52 ; -906.57,1547.88 ccw(c-906.57,1555.6) R23.1@-899.62,1552.24 ; -906.57,1547.88 cw(c-906.57,1540.16) R23.1@-899.62,1543.52 ; -906.57,1547.88 ccw(c-906.57,1555.6) R23.1@-899.62,1552.24 ; -906.57,1547.88 cw(c-906.57,1540.16) R23.1@-899.62,1543.52 ; -906.57,1547.88 ccw(c-906.57,1555.6) R23.1@-899.62,1552.24 ; -906.57,1547.88 ccw(c-906.57,1555.6) R23.1@-899.62,1552.24 ; -906.57,1547.88 cw(c-906.57,1540.16) R23.1@-899.62,1543.52 ; -906.57,1547.88 ccw(c-906.57,1555.6) R23.1@-899.62,1552.24 ; -906.57,1547.88 cw(c-906.57,1540.16) R23.1@-899.62,1543.52 ; -906.57,1547.88 ccw(c-906.57,1555.6) R23.1@-899.62,1552.24 ; -906.57,1547.88 cw(c-906.57,1540.16) R23.1@-899.62,1543.52 ; -906.57,1547.88 ccw(c-906.57,1555.6) R23.1@-899.62,1552.24 ; -906.57,1547.88 cw(c-906.57,1540.16) R23.1@-899.62,1543.52 ; -906.57,1547.88 R23.1@-890.62,1547.88
NetR24_1: R24.1 U7.12 U7.14 | length 2290.6
  TopLayer w10: U7.12@-1156.62,1813.88 -1156.62,1747.93 -1058.54,1649.84 -1016.54,1649.84 ; U7.14@-1116.12,1813.88 -1105.57,1813.88 v2(-1035.54,1743.84) ; R24.1@-1000.62,1607.88 -1000.62,1633.93 -1016.54,1649.84 ; -1056.73,1649.84 cw(c-1056.73,1628.65) v2@-1041.74,1643.63 ; -1056.73,1649.84 ccw(c-1056.73,1671.04) v2@-1041.74,1656.05 ; -1056.73,1649.84 cw(c-1056.73,1628.65) v2@-1041.74,1643.63 ; -1056.73,1649.84 ccw(c-1056.73,1671.04) v2@-1041.74,1656.05 ; -1056.73,1649.84 cw(c-1056.73,1628.65) v2@-1041.74,1643.63 ; -1056.73,1649.84 ccw(c-1056.73,1671.04) v2@-1041.74,1656.05 ; -1056.73,1649.84 cw(c-1056.73,1628.65) v2@-1041.74,1643.63 ; -1056.73,1649.84 ccw(c-1056.73,1671.04) v2@-1041.74,1656.05 ; -1056.73,1649.84 cw(c-1056.73,1628.65) v2@-1041.74,1643.63 ; -1056.73,1649.84 ccw(c-1056.73,1671.04) v2@-1041.74,1656.05 ; -1056.73,1649.84 ccw(c-1056.73,1671.04) v2@-1041.74,1656.05 ; -1056.73,1649.84 cw(c-1056.73,1628.65) v2@-1041.74,1643.63 ; -1056.73,1649.84 ccw(c-1056.73,1671.04) v2@-1041.74,1656.05 ; -1056.73,1649.84 cw(c-1056.73,1628.65) v2@-1041.74,1643.63 ; -1056.73,1649.84 ccw(c-1056.73,1671.04) v2@-1041.74,1656.05 ; -1056.73,1649.84 cw(c-1056.73,1628.65) v2@-1041.74,1643.63 ; -1056.73,1649.84 ccw(c-1056.73,1671.04) v2@-1041.74,1656.05 ; -1056.73,1649.84 cw(c-1056.73,1628.65) v2@-1041.74,1643.63 ; -1050.52,1758.83 cw(c-1065.51,1743.84) v2@-1044.31,1743.84 ; -1050.52,1758.83 ccw(c-1035.54,1773.82) v2@-1035.54,1752.62 ; -1050.52,1758.83 cw(c-1065.51,1743.84) v2@-1044.31,1743.84 ; -1050.52,1758.83 ccw(c-1035.54,1773.82) v2@-1035.54,1752.62 ; -1050.52,1758.83 cw(c-1065.51,1743.84) v2@-1044.31,1743.84 ; -1050.52,1758.83 ccw(c-1035.54,1773.82) v2@-1035.54,1752.62 ; -1050.52,1758.83 cw(c-1065.51,1743.84) v2@-1044.31,1743.84 ; -1050.52,1758.83 ccw(c-1035.54,1773.82) v2@-1035.54,1752.62 ; -1050.52,1758.83 cw(c-1065.51,1743.84) v2@-1044.31,1743.84 ; -1050.52,1758.83 ccw(c-1035.54,1773.82) v2@-1035.54,1752.62 ; -1050.52,1758.83 ccw(c-1035.54,1773.82) v2@-1035.54,1752.62 ; -1050.52,1758.83 cw(c-1065.51,1743.84) v2@-1044.31,1743.84 ; -1050.52,1758.83 ccw(c-1035.54,1773.82) v2@-1035.54,1752.62 ; -1050.52,1758.83 cw(c-1065.51,1743.84) v2@-1044.31,1743.84 ; -1050.52,1758.83 ccw(c-1035.54,1773.82) v2@-1035.54,1752.62 ; -1050.52,1758.83 cw(c-1065.51,1743.84) v2@-1044.31,1743.84 ; -1050.52,1758.83 ccw(c-1035.54,1773.82) v2@-1035.54,1752.62 ; -1050.52,1758.83 cw(c-1065.51,1743.84) v2@-1044.31,1743.84 ; v2@-1028.85,1644.15 cw(c-1016.54,1633.68) -1016.54,1649.84 ; v2@-1028.85,1644.15 cw(c-1016.54,1633.68) -1016.54,1649.84 ; v2@-1028.85,1644.15 cw(c-1016.54,1633.68) -1016.54,1649.84 ; v2@-1028.85,1644.15 cw(c-1016.54,1633.68) -1016.54,1649.84 ; v2@-1028.85,1644.15 cw(c-1016.54,1633.68) -1016.54,1649.84 ; v2@-1028.85,1644.15 cw(c-1016.54,1633.68) -1016.54,1649.84 ; v2@-1028.85,1644.15 cw(c-1016.54,1633.68) -1016.54,1649.84 ; v2@-1028.85,1644.15 cw(c-1016.54,1633.68) -1016.54,1649.84 ; v2@-1028.85,1644.15 cw(c-1016.54,1633.68) -1016.54,1649.84 ; v2@-1028.85,1655.53 ccw(c-1016.54,1666.01) -1016.54,1649.84 ; v2@-1028.85,1655.53 ccw(c-1016.54,1666.01) -1016.54,1649.84 ; v2@-1028.85,1655.53 ccw(c-1016.54,1666.01) -1016.54,1649.84 ; v2@-1028.85,1655.53 ccw(c-1016.54,1666.01) -1016.54,1649.84 ; v2@-1028.85,1655.53 ccw(c-1016.54,1666.01) -1016.54,1649.84 ; v2@-1028.85,1655.53 ccw(c-1016.54,1666.01) -1016.54,1649.84 ; v2@-1028.85,1655.53 ccw(c-1016.54,1666.01) -1016.54,1649.84 ; v2@-1028.85,1655.53 ccw(c-1016.54,1666.01) -1016.54,1649.84 ; v2@-1028.85,1655.53 ccw(c-1016.54,1666.01) -1016.54,1649.84 ; R24.1@-1007.69,1614.95 ccw(c-1024.76,1632.02) -1000.62,1632.02 ; R24.1@-1007.69,1614.95 ccw(c-1024.76,1632.02) -1000.62,1632.02 ; R24.1@-1007.69,1614.95 ccw(c-1024.76,1632.02) -1000.62,1632.02 ; R24.1@-1007.69,1614.95 ccw(c-1024.76,1632.02) -1000.62,1632.02 ; R24.1@-1007.69,1614.95 ccw(c-1024.76,1632.02) -1000.62,1632.02 ; R24.1@-1007.69,1614.95 ccw(c-1024.76,1632.02) -1000.62,1632.02 ; R24.1@-1007.69,1614.95 ccw(c-1024.76,1632.02) -1000.62,1632.02 ; R24.1@-1007.69,1614.95 ccw(c-1024.76,1632.02) -1000.62,1632.02 ; R24.1@-1007.69,1614.95 ccw(c-1024.76,1632.02) -1000.62,1632.02 ; -1000.62,1632.02 ccw(c-976.48,1632.02) R24.1@-993.55,1614.95 ; -1000.62,1632.02 ccw(c-976.48,1632.02) R24.1@-993.55,1614.95 ; -1000.62,1632.02 ccw(c-976.48,1632.02) R24.1@-993.55,1614.95 ; -1000.62,1632.02 ccw(c-976.48,1632.02) R24.1@-993.55,1614.95 ; -1000.62,1632.02 ccw(c-976.48,1632.02) R24.1@-993.55,1614.95 ; -1000.62,1632.02 ccw(c-976.48,1632.02) R24.1@-993.55,1614.95 ; -1000.62,1632.02 ccw(c-976.48,1632.02) R24.1@-993.55,1614.95 ; -1000.62,1632.02 ccw(c-976.48,1632.02) R24.1@-993.55,1614.95 ; -1000.62,1632.02 ccw(c-976.48,1632.02) R24.1@-993.55,1614.95
  BottomLayer w10: v2(-1035.54,1649.84) v2(-1035.54,1743.84) ; v2@-1041.74,1656.05 ccw(c-1056.73,1671.04) -1035.54,1671.04 ; v2@-1041.74,1656.05 ccw(c-1056.73,1671.04) -1035.54,1671.04 ; v2@-1041.74,1656.05 ccw(c-1056.73,1671.04) -1035.54,1671.04 ; v2@-1041.74,1656.05 ccw(c-1056.73,1671.04) -1035.54,1671.04 ; v2@-1041.74,1656.05 ccw(c-1056.73,1671.04) -1035.54,1671.04 ; v2@-1041.74,1656.05 ccw(c-1056.73,1671.04) -1035.54,1671.04 ; v2@-1041.74,1656.05 ccw(c-1056.73,1671.04) -1035.54,1671.04 ; v2@-1041.74,1656.05 ccw(c-1056.73,1671.04) -1035.54,1671.04 ; v2@-1041.74,1656.05 ccw(c-1056.73,1671.04) -1035.54,1671.04 ; v2@-1041.74,1737.63 cw(c-1056.73,1722.65) -1035.54,1722.65 ; v2@-1041.74,1737.63 cw(c-1056.73,1722.65) -1035.54,1722.65 ; v2@-1041.74,1737.63 cw(c-1056.73,1722.65) -1035.54,1722.65 ; v2@-1041.74,1737.63 cw(c-1056.73,1722.65) -1035.54,1722.65 ; v2@-1041.74,1737.63 cw(c-1056.73,1722.65) -1035.54,1722.65 ; v2@-1041.74,1737.63 cw(c-1056.73,1722.65) -1035.54,1722.65 ; v2@-1041.74,1737.63 cw(c-1056.73,1722.65) -1035.54,1722.65 ; v2@-1041.74,1737.63 cw(c-1056.73,1722.65) -1035.54,1722.65 ; v2@-1041.74,1737.63 cw(c-1056.73,1722.65) -1035.54,1722.65 ; -1035.54,1671.04 ccw(c-1014.34,1671.04) v2@-1029.33,1656.05 ; -1035.54,1671.04 ccw(c-1014.34,1671.04) v2@-1029.33,1656.05 ; -1035.54,1671.04 ccw(c-1014.34,1671.04) v2@-1029.33,1656.05 ; -1035.54,1671.04 ccw(c-1014.34,1671.04) v2@-1029.33,1656.05 ; -1035.54,1671.04 ccw(c-1014.34,1671.04) v2@-1029.33,1656.05 ; -1035.54,1671.04 ccw(c-1014.34,1671.04) v2@-1029.33,1656.05 ; -1035.54,1671.04 ccw(c-1014.34,1671.04) v2@-1029.33,1656.05 ; -1035.54,1671.04 ccw(c-1014.34,1671.04) v2@-1029.33,1656.05 ; -1035.54,1671.04 ccw(c-1014.34,1671.04) v2@-1029.33,1656.05 ; -1035.54,1722.65 cw(c-1014.34,1722.65) v2@-1029.33,1737.63 ; -1035.54,1722.65 cw(c-1014.34,1722.65) v2@-1029.33,1737.63 ; -1035.54,1722.65 cw(c-1014.34,1722.65) v2@-1029.33,1737.63 ; -1035.54,1722.65 cw(c-1014.34,1722.65) v2@-1029.33,1737.63 ; -1035.54,1722.65 cw(c-1014.34,1722.65) v2@-1029.33,1737.63 ; -1035.54,1722.65 cw(c-1014.34,1722.65) v2@-1029.33,1737.63 ; -1035.54,1722.65 cw(c-1014.34,1722.65) v2@-1029.33,1737.63 ; -1035.54,1722.65 cw(c-1014.34,1722.65) v2@-1029.33,1737.63 ; -1035.54,1722.65 cw(c-1014.34,1722.65) v2@-1029.33,1737.63
NetR27_1: R27.1 U3.10 | length 504.4
  TopLayer w10: R27.1@-3585.62,1602.88 -3580.62,1607.88 U3.10@-3580.62,1813.88 ; R27.1@-3592.69,1609.95 ccw(c-3621.84,1639.09) -3580.62,1639.09 ; R27.1@-3592.69,1609.95 ccw(c-3621.84,1639.09) -3580.62,1639.09 ; R27.1@-3592.69,1609.95 ccw(c-3621.84,1639.09) -3580.62,1639.09 ; R27.1@-3592.69,1609.95 ccw(c-3621.84,1639.09) -3580.62,1639.09 ; R27.1@-3592.69,1609.95 ccw(c-3621.84,1639.09) -3580.62,1639.09 ; R27.1@-3592.69,1609.95 ccw(c-3621.84,1639.09) -3580.62,1639.09 ; R27.1@-3592.69,1609.95 ccw(c-3621.84,1639.09) -3580.62,1639.09 ; R27.1@-3592.69,1609.95 ccw(c-3621.84,1639.09) -3580.62,1639.09 ; R27.1@-3592.69,1609.95 ccw(c-3621.84,1639.09) -3580.62,1639.09
NetR28_1: R28.1 U3.11 | length 583.4
  TopLayer w10: U3.11@-3560.62,1813.88 -3560.62,1715.84 -3485.62,1640.84 R28.1@-3485.62,1602.88 ; R28.1@-3492.69,1609.95 ccw(c-3509.76,1627.02) -3485.62,1627.02 ; R28.1@-3492.69,1609.95 ccw(c-3509.76,1627.02) -3485.62,1627.02 ; R28.1@-3492.69,1609.95 ccw(c-3509.76,1627.02) -3485.62,1627.02 ; R28.1@-3492.69,1609.95 ccw(c-3509.76,1627.02) -3485.62,1627.02 ; R28.1@-3492.69,1609.95 ccw(c-3509.76,1627.02) -3485.62,1627.02 ; R28.1@-3492.69,1609.95 ccw(c-3509.76,1627.02) -3485.62,1627.02 ; R28.1@-3492.69,1609.95 ccw(c-3509.76,1627.02) -3485.62,1627.02 ; R28.1@-3492.69,1609.95 ccw(c-3509.76,1627.02) -3485.62,1627.02 ; R28.1@-3492.69,1609.95 ccw(c-3509.76,1627.02) -3485.62,1627.02 ; -3485.62,1627.02 ccw(c-3461.48,1627.02) R28.1@-3478.55,1609.95 ; -3485.62,1627.02 ccw(c-3461.48,1627.02) R28.1@-3478.55,1609.95 ; -3485.62,1627.02 ccw(c-3461.48,1627.02) R28.1@-3478.55,1609.95 ; -3485.62,1627.02 ccw(c-3461.48,1627.02) R28.1@-3478.55,1609.95 ; -3485.62,1627.02 ccw(c-3461.48,1627.02) R28.1@-3478.55,1609.95 ; -3485.62,1627.02 ccw(c-3461.48,1627.02) R28.1@-3478.55,1609.95 ; -3485.62,1627.02 ccw(c-3461.48,1627.02) R28.1@-3478.55,1609.95 ; -3485.62,1627.02 ccw(c-3461.48,1627.02) R28.1@-3478.55,1609.95 ; -3485.62,1627.02 ccw(c-3461.48,1627.02) R28.1@-3478.55,1609.95
NetR29_1: R29.1 U4.9 | length 582.5
  TopLayer w10: R29.1@-2889.54,1604.84 -2889.54,1647.84 -2804.54,1732.84 U4.9@-2804.54,1810.84 ; R29.1@-2896.61,1611.91 ccw(c-2913.68,1628.98) -2889.54,1628.98 ; R29.1@-2896.61,1611.91 ccw(c-2913.68,1628.98) -2889.54,1628.98 ; R29.1@-2896.61,1611.91 ccw(c-2913.68,1628.98) -2889.54,1628.98 ; R29.1@-2896.61,1611.91 ccw(c-2913.68,1628.98) -2889.54,1628.98 ; R29.1@-2896.61,1611.91 ccw(c-2913.68,1628.98) -2889.54,1628.98 ; R29.1@-2896.61,1611.91 ccw(c-2913.68,1628.98) -2889.54,1628.98 ; R29.1@-2896.61,1611.91 ccw(c-2913.68,1628.98) -2889.54,1628.98 ; R29.1@-2896.61,1611.91 ccw(c-2913.68,1628.98) -2889.54,1628.98 ; R29.1@-2896.61,1611.91 ccw(c-2913.68,1628.98) -2889.54,1628.98 ; -2889.54,1628.98 ccw(c-2865.39,1628.98) R29.1@-2882.46,1611.91 ; -2889.54,1628.98 ccw(c-2865.39,1628.98) R29.1@-2882.46,1611.91 ; -2889.54,1628.98 ccw(c-2865.39,1628.98) R29.1@-2882.46,1611.91 ; -2889.54,1628.98 ccw(c-2865.39,1628.98) R29.1@-2882.46,1611.91 ; -2889.54,1628.98 ccw(c-2865.39,1628.98) R29.1@-2882.46,1611.91 ; -2889.54,1628.98 ccw(c-2865.39,1628.98) R29.1@-2882.46,1611.91 ; -2889.54,1628.98 ccw(c-2865.39,1628.98) R29.1@-2882.46,1611.91 ; -2889.54,1628.98 ccw(c-2865.39,1628.98) R29.1@-2882.46,1611.91 ; -2889.54,1628.98 ccw(c-2865.39,1628.98) R29.1@-2882.46,1611.91
NetR30_1: R30.1 U4.10 | length 499.4
  TopLayer w10: R30.1@-2789.54,1604.84 -2784.54,1609.84 U4.10@-2784.54,1810.84 ; R30.1@-2796.61,1611.91 ccw(c-2825.75,1641.06) -2784.54,1641.06 ; R30.1@-2796.61,1611.91 ccw(c-2825.75,1641.06) -2784.54,1641.06 ; R30.1@-2796.61,1611.91 ccw(c-2825.75,1641.06) -2784.54,1641.06 ; R30.1@-2796.61,1611.91 ccw(c-2825.75,1641.06) -2784.54,1641.06 ; R30.1@-2796.61,1611.91 ccw(c-2825.75,1641.06) -2784.54,1641.06 ; R30.1@-2796.61,1611.91 ccw(c-2825.75,1641.06) -2784.54,1641.06 ; R30.1@-2796.61,1611.91 ccw(c-2825.75,1641.06) -2784.54,1641.06 ; R30.1@-2796.61,1611.91 ccw(c-2825.75,1641.06) -2784.54,1641.06 ; R30.1@-2796.61,1611.91 ccw(c-2825.75,1641.06) -2784.54,1641.06
NetR31_1: R31.1 U4.11 | length 578.4
  TopLayer w10: U4.11@-2764.54,1810.84 -2764.54,1706.84 -2689.54,1631.84 R31.1@-2689.54,1604.84 ; R31.1@-2696.61,1611.91 ccw(c-2713.68,1628.98) -2689.54,1628.98 ; R31.1@-2696.61,1611.91 ccw(c-2713.68,1628.98) -2689.54,1628.98 ; R31.1@-2696.61,1611.91 ccw(c-2713.68,1628.98) -2689.54,1628.98 ; R31.1@-2696.61,1611.91 ccw(c-2713.68,1628.98) -2689.54,1628.98 ; R31.1@-2696.61,1611.91 ccw(c-2713.68,1628.98) -2689.54,1628.98 ; R31.1@-2696.61,1611.91 ccw(c-2713.68,1628.98) -2689.54,1628.98 ; R31.1@-2696.61,1611.91 ccw(c-2713.68,1628.98) -2689.54,1628.98 ; R31.1@-2696.61,1611.91 ccw(c-2713.68,1628.98) -2689.54,1628.98 ; R31.1@-2696.61,1611.91 ccw(c-2713.68,1628.98) -2689.54,1628.98 ; -2689.54,1628.98 ccw(c-2665.39,1628.98) R31.1@-2682.46,1611.91 ; -2689.54,1628.98 ccw(c-2665.39,1628.98) R31.1@-2682.46,1611.91 ; -2689.54,1628.98 ccw(c-2665.39,1628.98) R31.1@-2682.46,1611.91 ; -2689.54,1628.98 ccw(c-2665.39,1628.98) R31.1@-2682.46,1611.91 ; -2689.54,1628.98 ccw(c-2665.39,1628.98) R31.1@-2682.46,1611.91 ; -2689.54,1628.98 ccw(c-2665.39,1628.98) R31.1@-2682.46,1611.91 ; -2689.54,1628.98 ccw(c-2665.39,1628.98) R31.1@-2682.46,1611.91 ; -2689.54,1628.98 ccw(c-2665.39,1628.98) R31.1@-2682.46,1611.91 ; -2689.54,1628.98 ccw(c-2665.39,1628.98) R31.1@-2682.46,1611.91
NetR32_1: R32.1 U6.9 | length 587.5
  TopLayer w10: R32.1@-2080.62,1602.88 -2080.62,1649.76 -1995.62,1734.76 U6.9@-1995.62,1813.88 ; R32.1@-2087.69,1609.95 ccw(c-2104.76,1627.02) -2080.62,1627.02 ; R32.1@-2087.69,1609.95 ccw(c-2104.76,1627.02) -2080.62,1627.02 ; R32.1@-2087.69,1609.95 ccw(c-2104.76,1627.02) -2080.62,1627.02 ; R32.1@-2087.69,1609.95 ccw(c-2104.76,1627.02) -2080.62,1627.02 ; R32.1@-2087.69,1609.95 ccw(c-2104.76,1627.02) -2080.62,1627.02 ; R32.1@-2087.69,1609.95 ccw(c-2104.76,1627.02) -2080.62,1627.02 ; R32.1@-2087.69,1609.95 ccw(c-2104.76,1627.02) -2080.62,1627.02 ; R32.1@-2087.69,1609.95 ccw(c-2104.76,1627.02) -2080.62,1627.02 ; R32.1@-2087.69,1609.95 ccw(c-2104.76,1627.02) -2080.62,1627.02 ; -2080.62,1627.02 ccw(c-2056.48,1627.02) R32.1@-2073.55,1609.95 ; -2080.62,1627.02 ccw(c-2056.48,1627.02) R32.1@-2073.55,1609.95 ; -2080.62,1627.02 ccw(c-2056.48,1627.02) R32.1@-2073.55,1609.95 ; -2080.62,1627.02 ccw(c-2056.48,1627.02) R32.1@-2073.55,1609.95 ; -2080.62,1627.02 ccw(c-2056.48,1627.02) R32.1@-2073.55,1609.95 ; -2080.62,1627.02 ccw(c-2056.48,1627.02) R32.1@-2073.55,1609.95 ; -2080.62,1627.02 ccw(c-2056.48,1627.02) R32.1@-2073.55,1609.95 ; -2080.62,1627.02 ccw(c-2056.48,1627.02) R32.1@-2073.55,1609.95 ; -2080.62,1627.02 ccw(c-2056.48,1627.02) R32.1@-2073.55,1609.95
NetR33_1: R33.1 U6.10 | length 504.4
  TopLayer w10: R33.1@-1980.62,1602.88 -1975.62,1607.88 U6.10@-1975.62,1813.88 ; R33.1@-1987.69,1609.95 ccw(c-2016.84,1639.09) -1975.62,1639.09 ; R33.1@-1987.69,1609.95 ccw(c-2016.84,1639.09) -1975.62,1639.09 ; R33.1@-1987.69,1609.95 ccw(c-2016.84,1639.09) -1975.62,1639.09 ; R33.1@-1987.69,1609.95 ccw(c-2016.84,1639.09) -1975.62,1639.09 ; R33.1@-1987.69,1609.95 ccw(c-2016.84,1639.09) -1975.62,1639.09 ; R33.1@-1987.69,1609.95 ccw(c-2016.84,1639.09) -1975.62,1639.09 ; R33.1@-1987.69,1609.95 ccw(c-2016.84,1639.09) -1975.62,1639.09 ; R33.1@-1987.69,1609.95 ccw(c-2016.84,1639.09) -1975.62,1639.09 ; R33.1@-1987.69,1609.95 ccw(c-2016.84,1639.09) -1975.62,1639.09
NetR34_1: R34.1 U6.11 | length 583.4
  TopLayer w10: U6.11@-1955.62,1813.88 -1955.62,1705.93 -1880.62,1630.93 R34.1@-1880.62,1602.88 ; R34.1@-1887.69,1609.95 ccw(c-1904.76,1627.02) -1880.62,1627.02 ; R34.1@-1887.69,1609.95 ccw(c-1904.76,1627.02) -1880.62,1627.02 ; R34.1@-1887.69,1609.95 ccw(c-1904.76,1627.02) -1880.62,1627.02 ; R34.1@-1887.69,1609.95 ccw(c-1904.76,1627.02) -1880.62,1627.02 ; R34.1@-1887.69,1609.95 ccw(c-1904.76,1627.02) -1880.62,1627.02 ; R34.1@-1887.69,1609.95 ccw(c-1904.76,1627.02) -1880.62,1627.02 ; R34.1@-1887.69,1609.95 ccw(c-1904.76,1627.02) -1880.62,1627.02 ; R34.1@-1887.69,1609.95 ccw(c-1904.76,1627.02) -1880.62,1627.02 ; R34.1@-1887.69,1609.95 ccw(c-1904.76,1627.02) -1880.62,1627.02 ; -1880.62,1627.02 ccw(c-1856.48,1627.02) R34.1@-1873.55,1609.95 ; -1880.62,1627.02 ccw(c-1856.48,1627.02) R34.1@-1873.55,1609.95 ; -1880.62,1627.02 ccw(c-1856.48,1627.02) R34.1@-1873.55,1609.95 ; -1880.62,1627.02 ccw(c-1856.48,1627.02) R34.1@-1873.55,1609.95 ; -1880.62,1627.02 ccw(c-1856.48,1627.02) R34.1@-1873.55,1609.95 ; -1880.62,1627.02 ccw(c-1856.48,1627.02) R34.1@-1873.55,1609.95 ; -1880.62,1627.02 ccw(c-1856.48,1627.02) R34.1@-1873.55,1609.95 ; -1880.62,1627.02 ccw(c-1856.48,1627.02) R34.1@-1873.55,1609.95 ; -1880.62,1627.02 ccw(c-1856.48,1627.02) R34.1@-1873.55,1609.95
NetR35_1: R35.1 U7.9 | length 582.5
  TopLayer w10: R35.1@-1300.62,1607.88 -1300.62,1650.76 -1215.62,1735.76 U7.9@-1215.62,1813.88 ; R35.1@-1307.69,1614.95 ccw(c-1324.76,1632.02) -1300.62,1632.02 ; R35.1@-1307.69,1614.95 ccw(c-1324.76,1632.02) -1300.62,1632.02 ; R35.1@-1307.69,1614.95 ccw(c-1324.76,1632.02) -1300.62,1632.02 ; R35.1@-1307.69,1614.95 ccw(c-1324.76,1632.02) -1300.62,1632.02 ; R35.1@-1307.69,1614.95 ccw(c-1324.76,1632.02) -1300.62,1632.02 ; R35.1@-1307.69,1614.95 ccw(c-1324.76,1632.02) -1300.62,1632.02 ; R35.1@-1307.69,1614.95 ccw(c-1324.76,1632.02) -1300.62,1632.02 ; R35.1@-1307.69,1614.95 ccw(c-1324.76,1632.02) -1300.62,1632.02 ; R35.1@-1307.69,1614.95 ccw(c-1324.76,1632.02) -1300.62,1632.02 ; -1300.62,1632.02 ccw(c-1276.48,1632.02) R35.1@-1293.55,1614.95 ; -1300.62,1632.02 ccw(c-1276.48,1632.02) R35.1@-1293.55,1614.95 ; -1300.62,1632.02 ccw(c-1276.48,1632.02) R35.1@-1293.55,1614.95 ; -1300.62,1632.02 ccw(c-1276.48,1632.02) R35.1@-1293.55,1614.95 ; -1300.62,1632.02 ccw(c-1276.48,1632.02) R35.1@-1293.55,1614.95 ; -1300.62,1632.02 ccw(c-1276.48,1632.02) R35.1@-1293.55,1614.95 ; -1300.62,1632.02 ccw(c-1276.48,1632.02) R35.1@-1293.55,1614.95 ; -1300.62,1632.02 ccw(c-1276.48,1632.02) R35.1@-1293.55,1614.95 ; -1300.62,1632.02 ccw(c-1276.48,1632.02) R35.1@-1293.55,1614.95
NetR36_1: R36.1 U7.10 | length 499.4
  TopLayer w10: R36.1@-1200.62,1607.88 -1195.62,1612.88 U7.10@-1195.62,1813.88 ; R36.1@-1207.69,1614.95 ccw(c-1236.84,1644.09) -1195.62,1644.09 ; R36.1@-1207.69,1614.95 ccw(c-1236.84,1644.09) -1195.62,1644.09 ; R36.1@-1207.69,1614.95 ccw(c-1236.84,1644.09) -1195.62,1644.09 ; R36.1@-1207.69,1614.95 ccw(c-1236.84,1644.09) -1195.62,1644.09 ; R36.1@-1207.69,1614.95 ccw(c-1236.84,1644.09) -1195.62,1644.09 ; R36.1@-1207.69,1614.95 ccw(c-1236.84,1644.09) -1195.62,1644.09 ; R36.1@-1207.69,1614.95 ccw(c-1236.84,1644.09) -1195.62,1644.09 ; R36.1@-1207.69,1614.95 ccw(c-1236.84,1644.09) -1195.62,1644.09 ; R36.1@-1207.69,1614.95 ccw(c-1236.84,1644.09) -1195.62,1644.09
NetR37_1: R37.1 U7.11 | length 578.4
  TopLayer w10: U7.11@-1175.62,1813.88 -1175.62,1715.93 -1100.62,1640.93 R37.1@-1100.62,1607.88 ; R37.1@-1107.69,1614.95 ccw(c-1124.76,1632.02) -1100.62,1632.02 ; R37.1@-1107.69,1614.95 ccw(c-1124.76,1632.02) -1100.62,1632.02 ; R37.1@-1107.69,1614.95 ccw(c-1124.76,1632.02) -1100.62,1632.02 ; R37.1@-1107.69,1614.95 ccw(c-1124.76,1632.02) -1100.62,1632.02 ; R37.1@-1107.69,1614.95 ccw(c-1124.76,1632.02) -1100.62,1632.02 ; R37.1@-1107.69,1614.95 ccw(c-1124.76,1632.02) -1100.62,1632.02 ; R37.1@-1107.69,1614.95 ccw(c-1124.76,1632.02) -1100.62,1632.02 ; R37.1@-1107.69,1614.95 ccw(c-1124.76,1632.02) -1100.62,1632.02 ; R37.1@-1107.69,1614.95 ccw(c-1124.76,1632.02) -1100.62,1632.02 ; -1100.62,1632.02 ccw(c-1076.48,1632.02) R37.1@-1093.55,1614.95 ; -1100.62,1632.02 ccw(c-1076.48,1632.02) R37.1@-1093.55,1614.95 ; -1100.62,1632.02 ccw(c-1076.48,1632.02) R37.1@-1093.55,1614.95 ; -1100.62,1632.02 ccw(c-1076.48,1632.02) R37.1@-1093.55,1614.95 ; -1100.62,1632.02 ccw(c-1076.48,1632.02) R37.1@-1093.55,1614.95 ; -1100.62,1632.02 ccw(c-1076.48,1632.02) R37.1@-1093.55,1614.95 ; -1100.62,1632.02 ccw(c-1076.48,1632.02) R37.1@-1093.55,1614.95 ; -1100.62,1632.02 ccw(c-1076.48,1632.02) R37.1@-1093.55,1614.95 ; -1100.62,1632.02 ccw(c-1076.48,1632.02) R37.1@-1093.55,1614.95
NetR38_1: R38.1 U4.12 U4.14 | length 2335.2
  TopLayer w10: U4.12@-2745.54,1810.84 -2745.54,1739.84 -2653.54,1647.84 -2605.54,1647.84 ; U4.14@-2705.54,1810.84 U4.14@-2705.04,1810.34 ; U4.14@-2705.04,1810.84 -2693.54,1810.84 v2(-2628.54,1745.84) ; R38.1@-2589.54,1604.84 -2589.54,1631.84 -2605.54,1647.84 ; -2652.15,1647.84 cw(c-2652.15,1623.23) v2@-2634.74,1640.63 ; -2652.15,1647.84 cw(c-2652.15,1623.23) v2@-2634.74,1640.63 ; -2652.15,1647.84 cw(c-2652.15,1623.23) v2@-2634.74,1640.63 ; -2652.15,1647.84 cw(c-2652.15,1623.23) v2@-2634.74,1640.63 ; -2652.15,1647.84 cw(c-2652.15,1623.23) v2@-2634.74,1640.63 ; -2652.15,1647.84 cw(c-2652.15,1623.23) v2@-2634.74,1640.63 ; -2652.15,1647.84 cw(c-2652.15,1623.23) v2@-2634.74,1640.63 ; -2652.15,1647.84 cw(c-2652.15,1623.23) v2@-2634.74,1640.63 ; -2652.15,1647.84 cw(c-2652.15,1623.23) v2@-2634.74,1640.63 ; -2647.32,1647.84 ccw(c-2647.32,1665.62) v2@-2634.74,1653.05 ; -2647.32,1647.84 ccw(c-2647.32,1665.62) v2@-2634.74,1653.05 ; -2647.32,1647.84 ccw(c-2647.32,1665.62) v2@-2634.74,1653.05 ; -2647.32,1647.84 ccw(c-2647.32,1665.62) v2@-2634.74,1653.05 ; -2647.32,1647.84 ccw(c-2647.32,1665.62) v2@-2634.74,1653.05 ; -2647.32,1647.84 ccw(c-2647.32,1665.62) v2@-2634.74,1653.05 ; -2647.32,1647.84 ccw(c-2647.32,1665.62) v2@-2634.74,1653.05 ; -2647.32,1647.84 ccw(c-2647.32,1665.62) v2@-2634.74,1653.05 ; -2647.32,1647.84 ccw(c-2647.32,1665.62) v2@-2634.74,1653.05 ; -2643.52,1760.83 cw(c-2658.51,1745.84) v2@-2637.31,1745.84 ; -2643.52,1760.83 ccw(c-2628.54,1775.82) v2@-2628.54,1754.62 ; -2643.52,1760.83 cw(c-2658.51,1745.84) v2@-2637.31,1745.84 ; -2643.52,1760.83 ccw(c-2628.54,1775.82) v2@-2628.54,1754.62 ; -2643.52,1760.83 cw(c-2658.51,1745.84) v2@-2637.31,1745.84 ; -2643.52,1760.83 ccw(c-2628.54,1775.82) v2@-2628.54,1754.62 ; -2643.52,1760.83 cw(c-2658.51,1745.84) v2@-2637.31,1745.84 ; -2643.52,1760.83 ccw(c-2628.54,1775.82) v2@-2628.54,1754.62 ; -2643.52,1760.83 cw(c-2658.51,1745.84) v2@-2637.31,1745.84 ; -2643.52,1760.83 ccw(c-2628.54,1775.82) v2@-2628.54,1754.62 ; -2643.52,1760.83 ccw(c-2628.54,1775.82) v2@-2628.54,1754.62 ; -2643.52,1760.83 cw(c-2658.51,1745.84) v2@-2637.31,1745.84 ; -2643.52,1760.83 ccw(c-2628.54,1775.82) v2@-2628.54,1754.62 ; -2643.52,1760.83 cw(c-2658.51,1745.84) v2@-2637.31,1745.84 ; -2643.52,1760.83 ccw(c-2628.54,1775.82) v2@-2628.54,1754.62 ; -2643.52,1760.83 cw(c-2658.51,1745.84) v2@-2637.31,1745.84 ; -2643.52,1760.83 ccw(c-2628.54,1775.82) v2@-2628.54,1754.62 ; -2643.52,1760.83 cw(c-2658.51,1745.84) v2@-2637.31,1745.84 ; v2@-2622.33,1653.05 ccw(c-2609.75,1665.62) -2609.75,1647.84 ; v2@-2622.33,1653.05 ccw(c-2609.75,1665.62) -2609.75,1647.84 ; v2@-2622.33,1653.05 ccw(c-2609.75,1665.62) -2609.75,1647.84 ; v2@-2622.33,1653.05 ccw(c-2609.75,1665.62) -2609.75,1647.84 ; v2@-2622.33,1653.05 ccw(c-2609.75,1665.62) -2609.75,1647.84 ; v2@-2622.33,1653.05 ccw(c-2609.75,1665.62) -2609.75,1647.84 ; v2@-2622.33,1653.05 ccw(c-2609.75,1665.62) -2609.75,1647.84 ; v2@-2622.33,1653.05 ccw(c-2609.75,1665.62) -2609.75,1647.84 ; v2@-2622.33,1653.05 ccw(c-2609.75,1665.62) -2609.75,1647.84 ; v2@-2622.22,1640.75 cw(c-2605.51,1624.64) -2605.51,1647.84 ; v2@-2622.22,1640.75 cw(c-2605.51,1624.64) -2605.51,1647.84 ; v2@-2622.22,1640.75 cw(c-2605.51,1624.64) -2605.51,1647.84 ; v2@-2622.22,1640.75 cw(c-2605.51,1624.64) -2605.51,1647.84 ; v2@-2622.22,1640.75 cw(c-2605.51,1624.64) -2605.51,1647.84 ; v2@-2622.22,1640.75 cw(c-2605.51,1624.64) -2605.51,1647.84 ; v2@-2622.22,1640.75 cw(c-2605.51,1624.64) -2605.51,1647.84 ; v2@-2622.22,1640.75 cw(c-2605.51,1624.64) -2605.51,1647.84 ; v2@-2622.21,1640.75 cw(c-2605.54,1624.69) -2605.54,1647.84 ; R38.1@-2596.61,1611.91 ccw(c-2613.68,1628.98) -2589.54,1628.98 ; R38.1@-2596.61,1611.91 ccw(c-2613.68,1628.98) -2589.54,1628.98 ; R38.1@-2596.61,1611.91 ccw(c-2613.68,1628.98) -2589.54,1628.98 ; R38.1@-2596.61,1611.91 ccw(c-2613.68,1628.98) -2589.54,1628.98 ; R38.1@-2596.61,1611.91 ccw(c-2613.68,1628.98) -2589.54,1628.98 ; R38.1@-2596.61,1611.91 ccw(c-2613.68,1628.98) -2589.54,1628.98 ; R38.1@-2596.61,1611.91 ccw(c-2613.68,1628.98) -2589.54,1628.98 ; R38.1@-2596.61,1611.91 ccw(c-2613.68,1628.98) -2589.54,1628.98 ; R38.1@-2596.61,1611.91 ccw(c-2613.68,1628.98) -2589.54,1628.98 ; -2589.54,1628.98 ccw(c-2565.39,1628.98) R38.1@-2582.46,1611.91 ; -2589.54,1628.98 ccw(c-2565.39,1628.98) R38.1@-2582.46,1611.91 ; -2589.54,1628.98 ccw(c-2565.39,1628.98) R38.1@-2582.46,1611.91 ; -2589.54,1628.98 ccw(c-2565.39,1628.98) R38.1@-2582.46,1611.91 ; -2589.54,1628.98 ccw(c-2565.39,1628.98) R38.1@-2582.46,1611.91 ; -2589.54,1628.98 ccw(c-2565.39,1628.98) R38.1@-2582.46,1611.91 ; -2589.54,1628.98 ccw(c-2565.39,1628.98) R38.1@-2582.46,1611.91 ; -2589.54,1628.98 ccw(c-2565.39,1628.98) R38.1@-2582.46,1611.91 ; -2589.54,1628.98 ccw(c-2565.39,1628.98) R38.1@-2582.46,1611.91
  BottomLayer w10: v2(-2628.54,1646.84) v2(-2628.54,1745.84) ; v2@-2634.74,1653.05 ccw(c-2649.73,1668.04) -2628.54,1668.04 ; v2@-2634.74,1653.05 ccw(c-2649.73,1668.04) -2628.54,1668.04 ; v2@-2634.74,1653.05 ccw(c-2649.73,1668.04) -2628.54,1668.04 ; v2@-2634.74,1653.05 ccw(c-2649.73,1668.04) -2628.54,1668.04 ; v2@-2634.74,1653.05 ccw(c-2649.73,1668.04) -2628.54,1668.04 ; v2@-2634.74,1653.05 ccw(c-2649.73,1668.04) -2628.54,1668.04 ; v2@-2634.74,1653.05 ccw(c-2649.73,1668.04) -2628.54,1668.04 ; v2@-2634.74,1653.05 ccw(c-2649.73,1668.04) -2628.54,1668.04 ; v2@-2634.74,1653.05 ccw(c-2649.73,1668.04) -2628.54,1668.04 ; v2@-2634.74,1739.63 cw(c-2649.73,1724.65) -2628.54,1724.65 ; v2@-2634.74,1739.63 cw(c-2649.73,1724.65) -2628.54,1724.65 ; v2@-2634.74,1739.63 cw(c-2649.73,1724.65) -2628.54,1724.65 ; v2@-2634.74,1739.63 cw(c-2649.73,1724.65) -2628.54,1724.65 ; v2@-2634.74,1739.63 cw(c-2649.73,1724.65) -2628.54,1724.65 ; v2@-2634.74,1739.63 cw(c-2649.73,1724.65) -2628.54,1724.65 ; v2@-2634.74,1739.63 cw(c-2649.73,1724.65) -2628.54,1724.65 ; v2@-2634.74,1739.63 cw(c-2649.73,1724.65) -2628.54,1724.65 ; v2@-2634.74,1739.63 cw(c-2649.73,1724.65) -2628.54,1724.65 ; -2628.54,1668.04 ccw(c-2607.34,1668.04) v2@-2622.33,1653.05 ; -2628.54,1668.04 ccw(c-2607.34,1668.04) v2@-2622.33,1653.05 ; -2628.54,1668.04 ccw(c-2607.34,1668.04) v2@-2622.33,1653.05 ; -2628.54,1668.04 ccw(c-2607.34,1668.04) v2@-2622.33,1653.05 ; -2628.54,1668.04 ccw(c-2607.34,1668.04) v2@-2622.33,1653.05 ; -2628.54,1668.04 ccw(c-2607.34,1668.04) v2@-2622.33,1653.05 ; -2628.54,1668.04 ccw(c-2607.34,1668.04) v2@-2622.33,1653.05 ; -2628.54,1668.04 ccw(c-2607.34,1668.04) v2@-2622.33,1653.05 ; -2628.54,1668.04 ccw(c-2607.34,1668.04) v2@-2622.33,1653.05 ; -2628.54,1724.65 cw(c-2607.34,1724.65) v2@-2622.33,1739.63 ; -2628.54,1724.65 cw(c-2607.34,1724.65) v2@-2622.33,1739.63 ; -2628.54,1724.65 cw(c-2607.34,1724.65) v2@-2622.33,1739.63 ; -2628.54,1724.65 cw(c-2607.34,1724.65) v2@-2622.33,1739.63 ; -2628.54,1724.65 cw(c-2607.34,1724.65) v2@-2622.33,1739.63 ; -2628.54,1724.65 cw(c-2607.34,1724.65) v2@-2622.33,1739.63 ; -2628.54,1724.65 cw(c-2607.34,1724.65) v2@-2622.33,1739.63 ; -2628.54,1724.65 cw(c-2607.34,1724.65) v2@-2622.33,1739.63 ; -2628.54,1724.65 cw(c-2607.34,1724.65) v2@-2622.33,1739.63